# Altium PCB Switch.PcbDoc
Units mm, origin at the board's own origin, x right, y up, seen from the top; angles counter-clockwise.
Board outline 27 x 29 mm, 2 copper layers (Top Layer, Bottom Layer); 15 components, 11 nets, 37 pads, 43 vias.
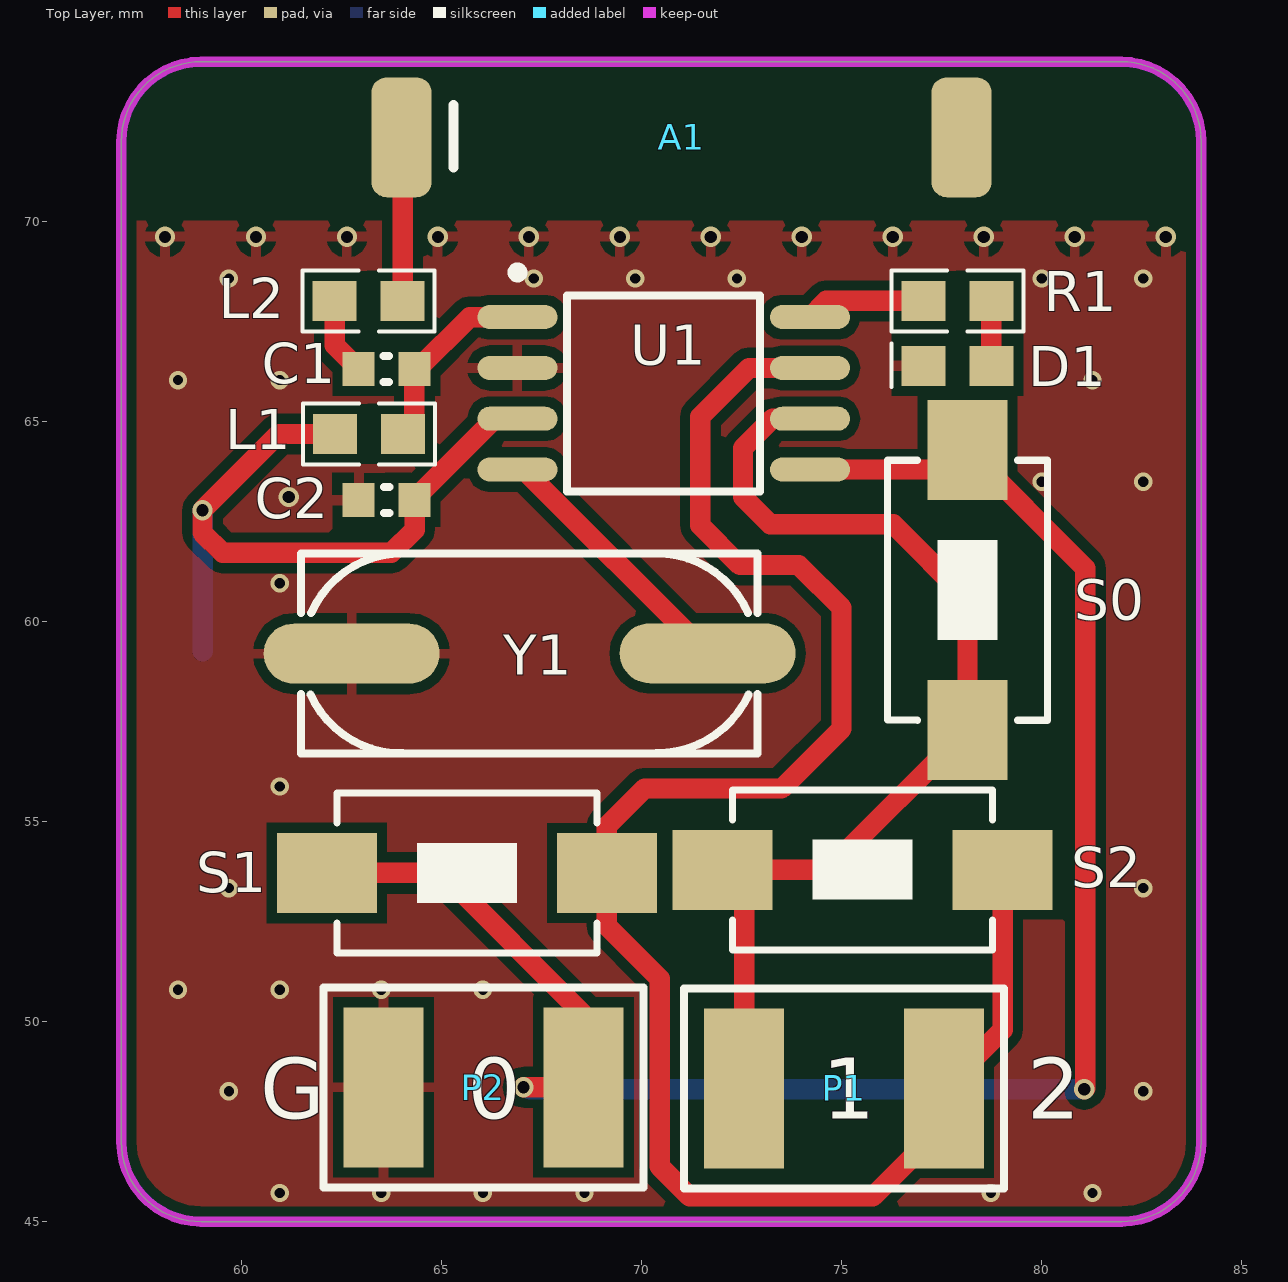
[diagram p0: Top Layer view]
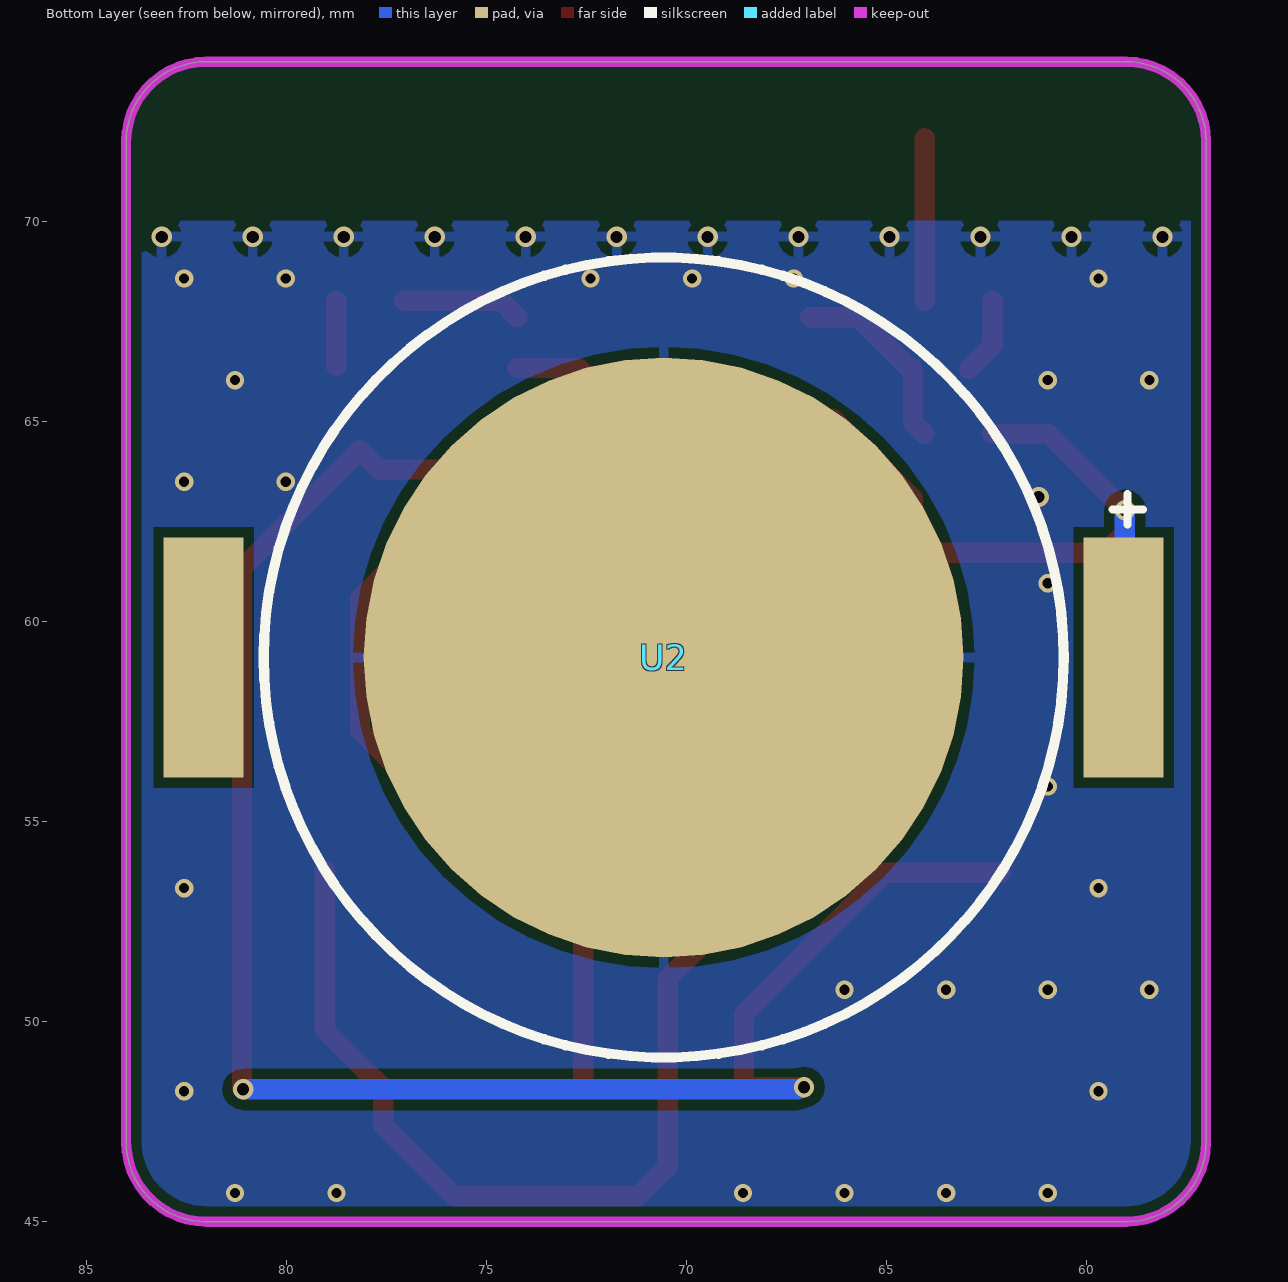
[diagram p1: Bottom Layer view, seen from below]

## Layer stack, top to bottom
Top Solder: solder mask 0.0102, Solder Resist, Dk 3.5
Top Layer: signal copper 0.0356
Dielectric 1: dielectric 0.32, FR-4, Dk 4.8
Bottom Layer: signal copper 0.0356
Bottom Solder: solder mask 0.0102, Solder Resist, Dk 3.5

## Board outline
57,47 ccw(c59,47) 59,45 82,45 ccw(c82,47) 84,47 84,72 ccw(c82,72) 82,74 59,74 ccw(c59,72) 57,72

## Design rules (kind name [scope] priority, off if disabled: settings)
Clearance [All] p1: gap=0.254
PolygonConnect [All] p1: connectstyle=Relief reliefconductorwidth=0.254 reliefentries=4 polygonreliefangle="90 Angle" airgapwidth=0.254
RoutingVias [All] p1: holewidth=0.305 width=0.508 viastyle="Through Hole" minholewidth=0.254 minwidth=0.457 maxholewidth=0.711 maxwidth=1.27
SolderMaskExpansion [All] p1: expansion=0.102
Width [All] p1: maxlimit=2.54 minlimit=0.152 preferedwidth=0.254
29 further rules are at their usual default settings.

## Components (designator, comment, footprint, x,y, rotation, side; value= is the part's Value field where it differs from the comment)
A1 "ANT" ANT15030R433 64.008,72.111 r0 top
C1 "Cap" 0603-2 63.627,66.319 r0 top
C2 "Cap" 0603-2 63.634,63.043 r0 top
D1 "LED0" LED_0603 77.902,66.396 r180 top
L1 "Inductor" 0603-1 63.195,64.694 r180 top
L2 "Inductor" 0603-1 63.183,68.021 r0 top
P1 "Header 2" HDR2X1_焊接版 77.572,48.336 r180 top
P2 "Header 2" HDR2X1_焊接版 68.555,48.362 r180 top
R1 "12K" 0603-1 77.902,68.021 r180 top
S0 "SW-PB" SW_PB2_A1 78.156,60.731 r0 top
S1 "SW-PB" SW_PB2_A1 75.59,53.797 r90 top
S2 "SW-PB" SW_PB2_A1 65.583,53.721 r270 top
U1 "RF112B-A" SOIC-8 70.561,65.71 r0 top
U2 "CR2032" CR2032-SMD 70.561,59.106 r0 bottom
Y1 "XTAL" X-SM49 67.208,59.207 r180 top

## Footprints (in the part's own frame and the unit in brackets; to place one, negate y for a bottom-side part, rotate by r counter-clockwise, add the part's x,y. Pads: shape width x height; smd on the part's side, far side on the other; paste and mask are expansions set on the pad)
0603-1 [mm] "贴片带丝印"
  rect 1.1x1 smd: 1(-0.85,0) 2(0.85,0)
  silkscreen extent -1.65,-0.76 1.65,0.76, body extent -1.14,-0.38 1.14,0.38, height 1
0603-2 [mm] "贴片无丝印"
  rect 0.8x0.85 smd: 1(-0.7,0) 2(0.7,0)
  silkscreen extent -0.07,-0.33 0.07,0.33, body extent -0.87,-0.47 0.87,0.47, height 0.85
ANT15030R433 [mm] "15x3mm,433M陶瓷天线"
  rrect50% 1.5x3 smd: 1(0,0) ""(14,0)
  silkscreen extent 1.3,-0.75 1.3,0.8
CR2032-SMD [mm] "纽扣电池座-贴片"
  rect 2x6 smd: 0(11.5,0) 2(-11.5,0)
  round 15 smd: 1(0,0)
  silkscreen extent -11.98,-10 10,10
HDR2X1_焊接版 [mm] "用于焊接裸露导线"
  rect 2x4 smd: 1(0,0) 2(5,0)
  silkscreen extent -1.5,-2.5 6.5,2.5
LED_0603 [mm] "带丝印层"
  rect 1.1x1 smd: 1(-0.85,0) 2(0.85,0)
  silkscreen extent 1.65,-0.56 1.65,0.53, body extent -1.14,-0.38 1.14,0.38, height 1
SOIC-8 [mm]
  oval 2x0.6 smd: 1(-3.658,1.905) 2(-3.658,0.635) 3(-3.658,-0.635) 4(-3.658,-1.905) 5(3.658,-1.905) 6(3.658,-0.635) 7(3.658,0.635) 8(3.658,1.905)
  silkscreen extent -3.78,-2.45 2.41,3.15
SW_PB2_A1 [mm] "实验室常用复位开关，白色"
  rect 2x2.5 smd: 1(0,3.556) 2(0,-3.444)
  silkscreen extent -2,-3.19 2,3.31, body extent -2.03,-3.17 2.03,3.3, height 1.2
X-SM49 [mm] "贴片晶振"
  oval 4.4x1.5 smd: 1(4.45,0.004) 2(-4.45,-0.004)
  silkscreen extent -5.7,-2.5 5.72,2.5

## Part data
C1 C2: "无极性电容"
D1: "发光二极管"
L1 L2: "电感"
P1 P2: "接插件"
R1: library part Res1, "贴片电阻"
S0 S1 S2: "微动开关"
U1: "内置编码无线发射芯片"
U2: "纽扣电池座"
Y1: "晶振"

## Via types
v1: diameter 0.457, hole 0.254, Top Layer to Bottom Layer, 27 vias
v2: diameter 0.508, hole 0.305, Top Layer to Bottom Layer, 16 vias

## Nets (pads, with @x,y where several pads share a name; then routed paths per layer and width w, separated by ;. In a path a pad name is that pad's centre, name@x,y a point inside that pad or via, vN(x,y) a via of type N, cw(c..) or ccw(c..) an arc to the next point about the centre after c; other vN are vias at no path point)
3V3: C2.2 L1.2 U1.3 U2.2 | length 18.1
  Top Layer w0.508: L1.2 60.935,64.694 v2(59.03,62.789) 59.03,62.23 59.538,61.722 63.754,61.722 64.334,62.302 C2.2 64.334,63.078 66.331,65.075 U1.3
  Bottom Layer w0.508: v2(59.03,62.789) 59.036,62.783 U2.2@59.036,59.258
GND: C2.1 D1.2 P2.2 U1.2 U2.1 Y1.1
  other v1: 60.96,45.72 63.5,45.72 66.04,45.72 68.58,45.72 78.74,45.72 81.28,45.72 59.69,48.26 82.55,48.26 58.42,50.8 60.96,50.8 63.5,50.8 66.04,50.8 59.69,53.34 82.55,53.34 60.96,55.88 60.96,60.96 80.01,63.5 82.55,63.5 58.42,66.04 60.96,66.04 81.28,66.04 59.69,68.58 67.31,68.58 69.85,68.58 72.39,68.58 80.01,68.58 82.55,68.58
  other v2: 61.189,63.119 58.092,69.621 60.367,69.621 62.641,69.621 64.915,69.621 67.19,69.621 69.464,69.621 71.739,69.621 74.013,69.621 76.288,69.621 78.562,69.621 80.837,69.621 83.111,69.621
NetA1_1: A1.1 L2.2 | length 4.1
  Top Layer w0.508: L2.2 A1.1@64.033,72.085
NetC1_1: C1.1 L2.1 | length 1.9
  Top Layer w0.508: L2.1 62.333,66.913 C1.1
NetC1_2: C1.2 L1.1 U1.1 | length 4.9
  Top Layer w0.508: L1.1 64.327,64.976 C1.2 64.414,66.319 65.71,67.615 U1.1
NetD1_1: D1.1 R1.1 | length 1.6
  Top Layer w0.508: D1.1 R1.1
NetR1_2: R1.2 U1.8 | length 3
  Top Layer w0.508: U1.8 74.625,68.021 R1.2
NetU1_4: U1.4 Y1.2 | length 6.7
  Top Layer w0.508: U1.4 67.065,63.805 Y1.2
S0: P2.1 S0.1 S2.2 U1.5 | length 46.4
  Top Layer w0.508: S2.2 65.024,53.721 68.555,50.19 P2.1 v2(67.056,48.362) ; U1.5 77.673,63.805 S0.1 81.102,61.341 81.102,48.336 v2(81.077,48.311)
  Bottom Layer w0.508: v2@67.208,48.311 v2(81.077,48.311)
S1: P1.2 S0.2 S1.1 U1.6 | length 26.4
  Top Layer w0.508: P1.2 72.572,53.26 S1.1 74.666,53.797 S0.2 78.156,60.579 76.302,62.433 73.228,62.433 72.542,63.119 72.542,64.338 73.279,65.075 U1.6
S2: P1.1 S1.2 S2.1 U1.7 | length 44.5
  Top Layer w0.508: U1.7 72.695,66.345 71.476,65.126 71.476,62.408 72.466,61.417 73.939,61.417 75.006,60.35 75.006,57.328 73.508,55.829 70.079,55.829 69.139,54.889 S2.1 69.139,52.4 70.46,51.079 70.46,46.38 71.205,45.635 75.794,45.635 77.572,47.413 P1.1 79.034,49.799 S1.2
pads on no net: A1. U2.0

## Polygon pours and split planes (outlines as drawn)
GND on Bottom Layer "GND" (solid, remove dead copper, pour order 2): 55.753,70.231 55.956,70.028 84.76,70.028 84.76,46.304 82.829,44.374 82.728,44.272 56.261,44.272 56.261,69.596 55.905,69.952
GND on Top Layer "GND" (solid, remove dead copper, pour order 2): 55.753,70.231 55.956,70.028 84.76,70.028 84.76,46.304 82.829,44.374 82.728,44.272 56.261,44.272 56.261,69.596 55.905,69.952

## Keep-outs
Keep-Out Layer:
  the board outline again, w0.254

## Silkscreen, mask and mechanical layers (free items; w line width, h text height)
Top Overlay:
  text "G" at 60.477,47.574 h1.52
  text "0" at 65.659,47.574 h1.52
  text "1" at 74.524,47.574 h1.52
  text "2" at 79.654,47.574 h1.52

## Dimensions
59,74 to 59,45 on Mechanical 1
57,72 to 84,72 on Mechanical 1